# Altium PCB DomeControl.PcbDoc
Units mm, origin at the board's own origin, x right, y up, seen from the top; angles counter-clockwise.
Board outline 65.53 x 80.14 mm, 2 copper layers (Top Layer, Bottom Layer); 28 components, 34 nets, 112 pads, 0 vias.
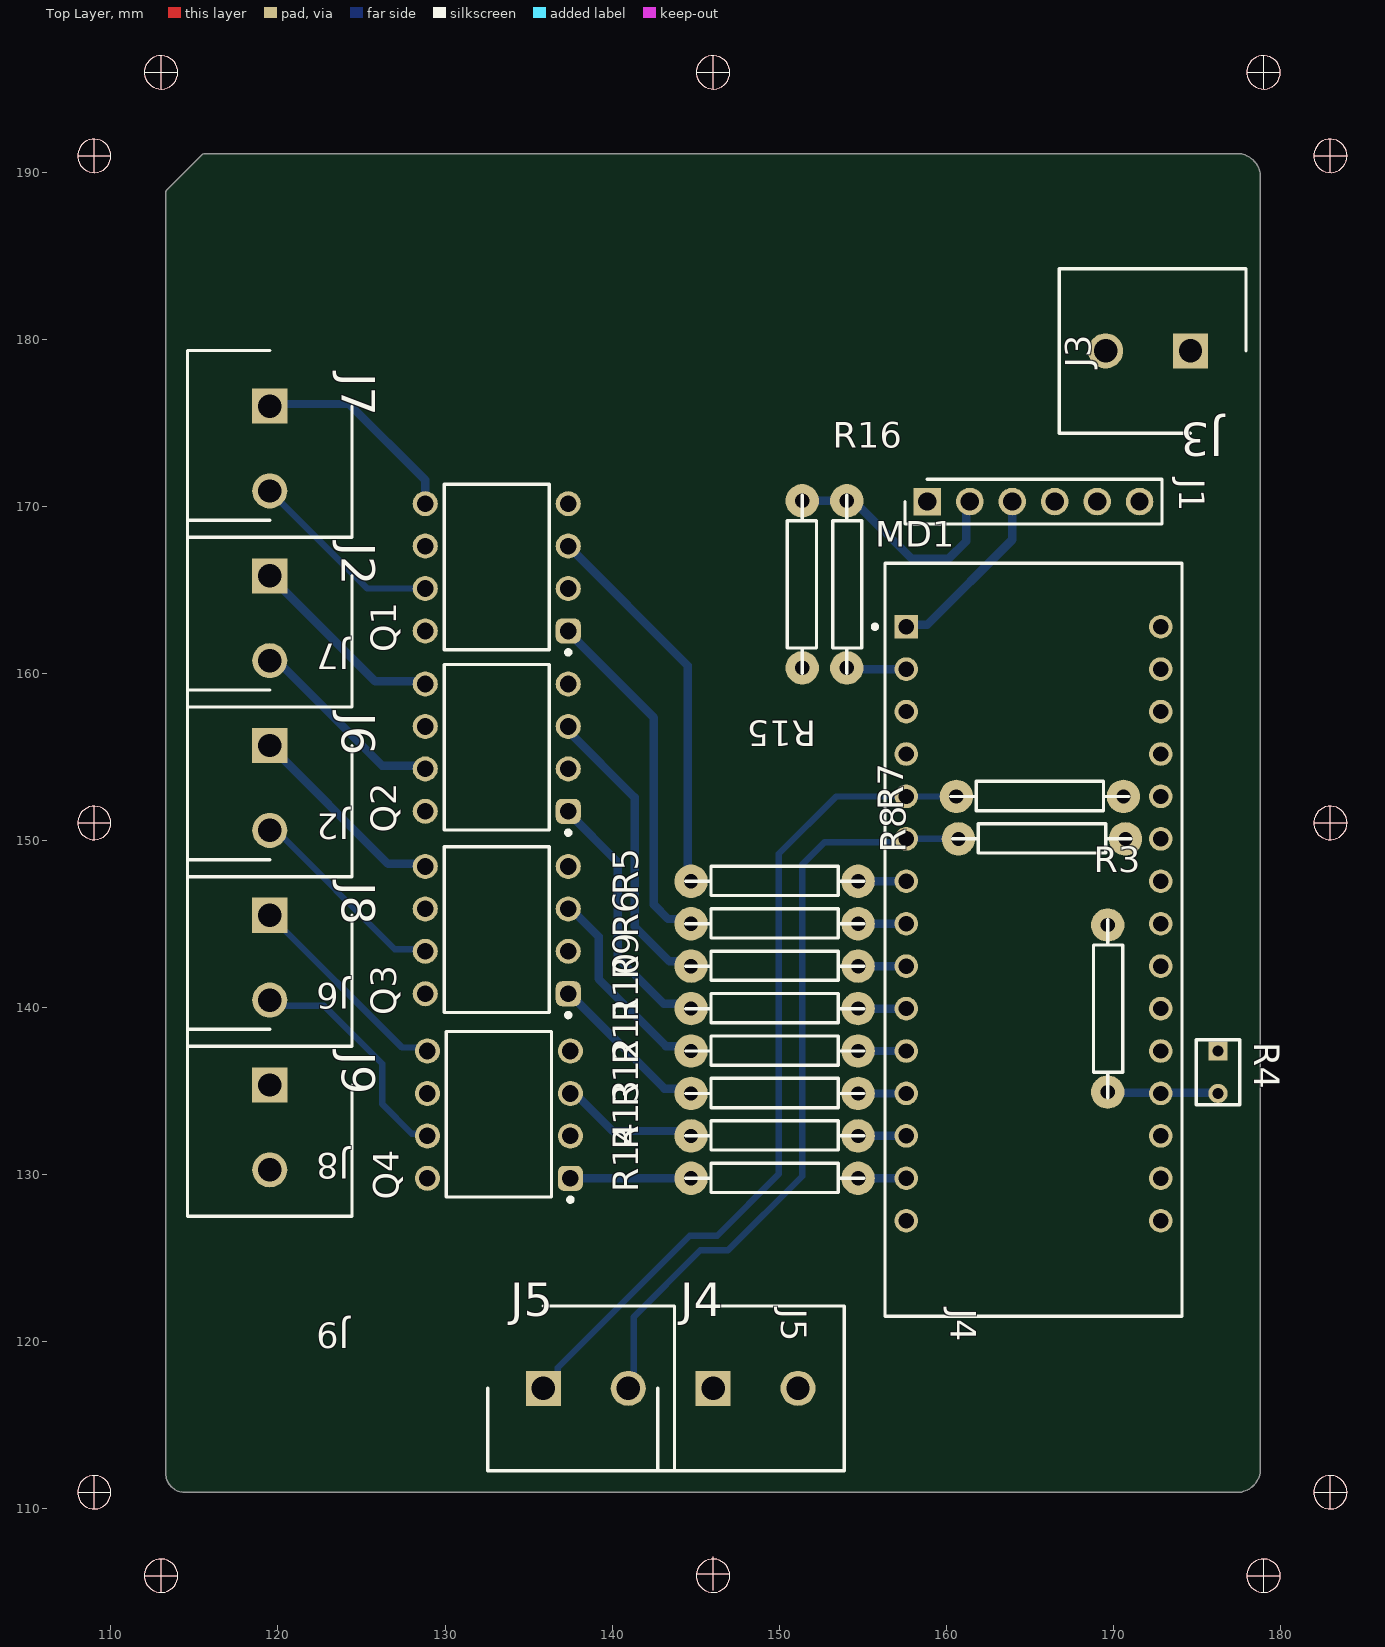
[diagram p0: Top Layer view]
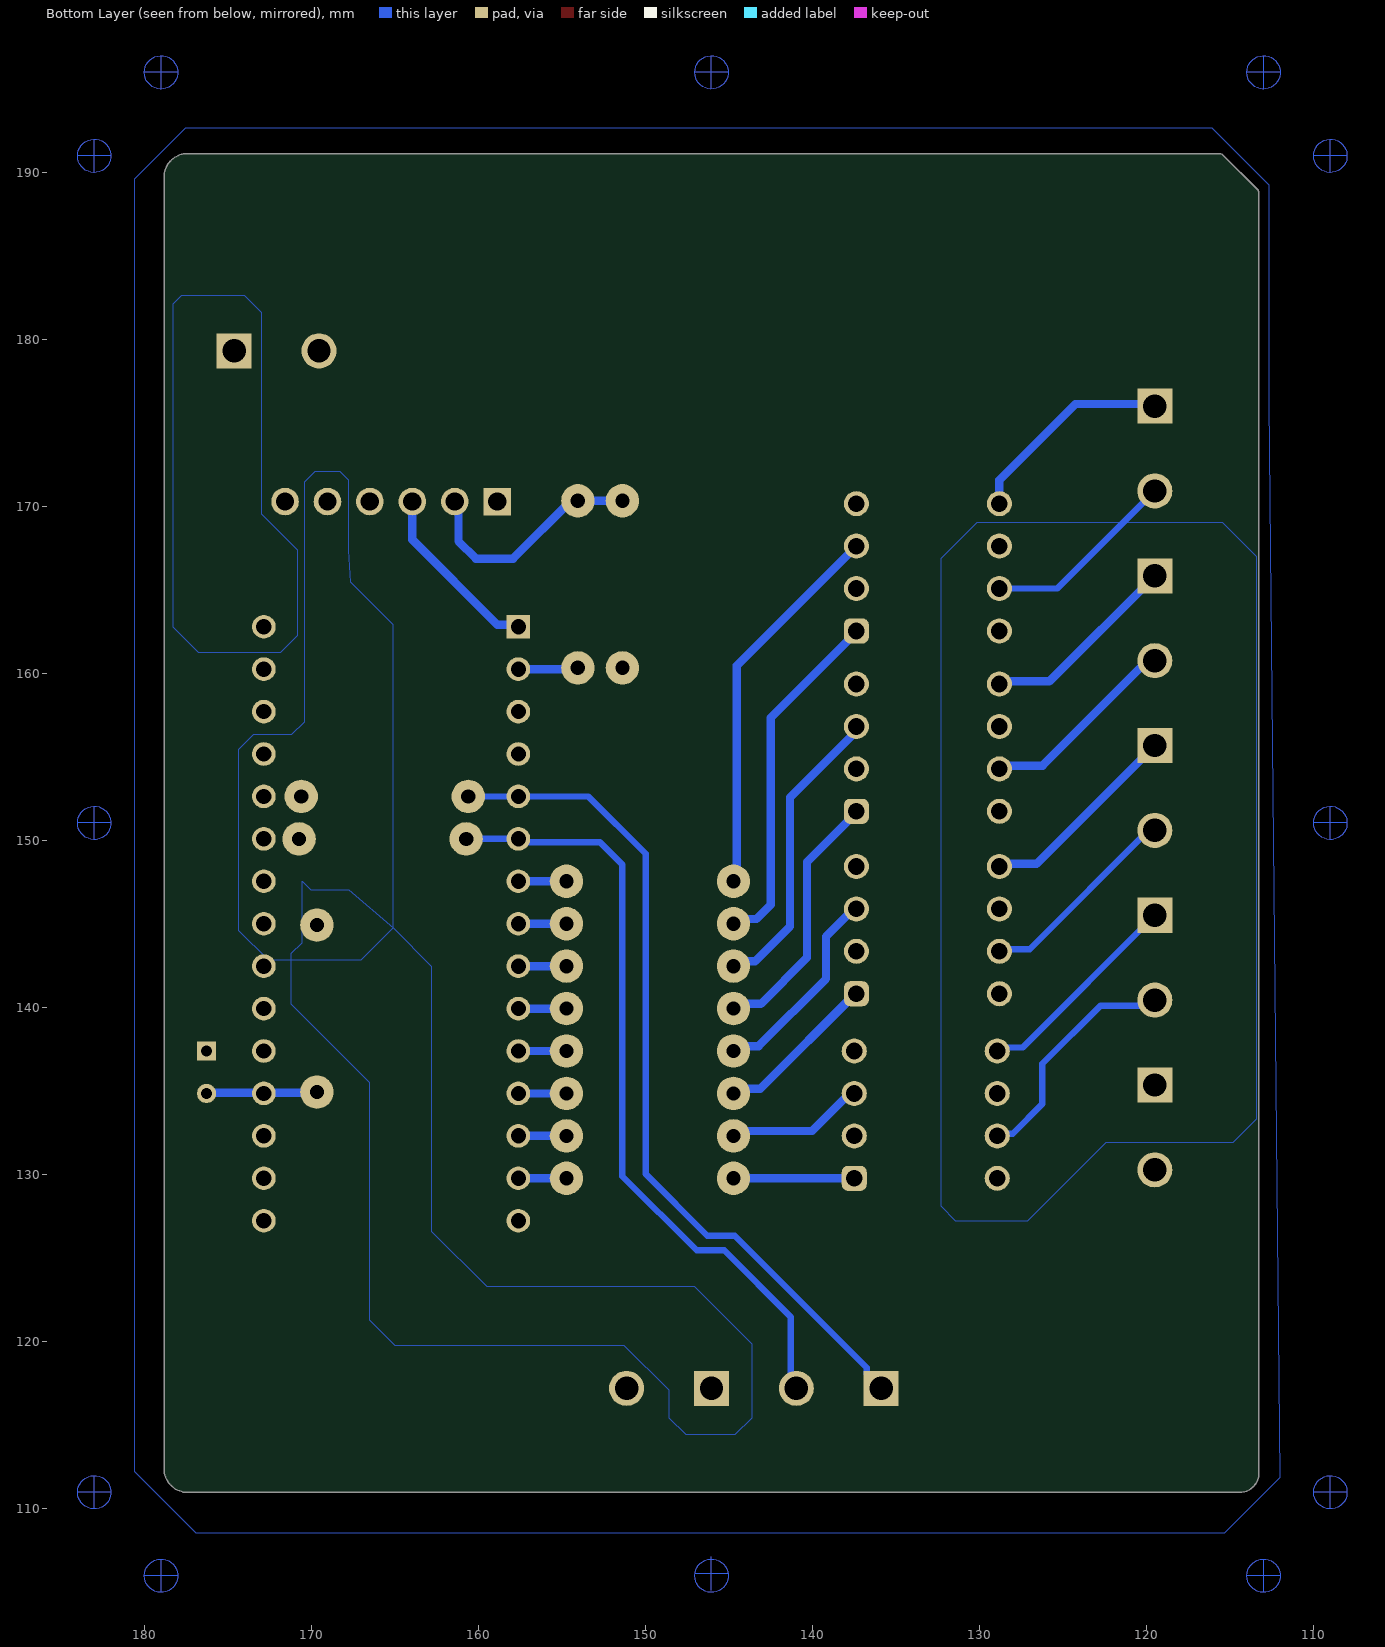
[diagram p1: Bottom Layer view, seen from below]

## Layer stack, top to bottom
Top Solder: solder mask 0.0102, Solder Resist, Dk 3.5
Top Layer: signal copper 0.0356
Dielectric 1: dielectric 0.32, FR-4, Dk 4.8
Bottom Layer: signal copper 0.0356
Bottom Solder: solder mask 0.0102, Solder Resist, Dk 3.5

## Board outline
113.284,112.125 ccw(c114.411,112.125) 114.411,110.998 114.427,110.998 177.689,110.998 177.79,111.048 ccw(c177.419,112.395) 178.816,112.395 178.816,189.738 ccw(c177.419,189.738) 177.77,191.091 177.673,191.135 115.57,191.135 115.48,191.098 113.321,188.939 113.284,188.849

## Design rules (kind name [scope] priority, off if disabled: settings)
AssemblyTestPointUsage [All] p0: scope1count=1 scope1_0_kind=Board scope1_0_value=Board scope2count=1 scope2_0_kind=Board scope2_0_value=Board commentlength=0
AssemblyTestpoint [All] p0: scope1count=1 scope1_0_kind=Board scope1_0_value=Board scope2count=1 scope2_0_kind=Board scope2_0_value=Board commentlength=0
BoardOutlineClearance [All] p0: scope1count=1 scope1_0_kind=Board scope1_0_value=Board scope2count=1 scope2_0_kind=Board scope2_0_value=Board commentlength=0 gap=1
BoardOutlineClearance [All] p1: gap=1 ignorepadtopadclearanceinfootprint=FALSE
Clearance Clearance_1 [All] p0 off: scope1count=1 scope1_0_kind=Board scope1_0_value=Board scope2count=1 scope2_0_kind=Board scope2_0_value=Board commentlength=114 gap=0.5 // Protel DXP Scope 1 Expression Was: InNamedPolygon('GND') or InNamedPolygon('+24V') or InNamedPolygon('+5V_ex')
Clearance [All] p0: scope1count=1 scope1_0_kind=Board scope1_0_value=Board scope2count=1 scope2_0_kind=Board scope2_0_value=Board commentlength=0 gap=0.152
Clearance Clearance_1 [InNamedPolygon('GND') or InNamedPolygon('+24V') or InNamedPolygon('+5V_ex')] p1: gap=0.5 ignorepadtopadclearanceinfootprint=FALSE
Clearance [All] p2: gap=0.152 ignorepadtopadclearanceinfootprint=FALSE
ComponentClearance [All] p0: scope1count=1 scope1_0_kind=Board scope1_0_value=Board scope2count=1 scope2_0_kind=Board scope2_0_value=Board commentlength=0 gap=0.254 collisioncheckmode=3
DiffPairsRouting [All] p0: scope1count=1 scope1_0_kind=Board scope1_0_value=Board scope2count=1 scope2_0_kind=Board scope2_0_value=Board commentlength=0
DiffPairsRouting [All] p1: maxlimit=10 minlimit=0.2 mostfreqgap=0.2 toplayer_minwidth=0.381 toplayer_maxwidth=0.381 toplayer_prefwidth=0.381 bottomlayer_minwidth=0.381 bottomlayer_maxwidth=0.381 bottomlayer_prefwidth=0.381 maxuncoupledlength=12.7
FabricationTestPointUsage FabricationTestPointUsage_1 [All] p0: scope1count=1 scope1_0_kind=Board scope1_0_value=Board scope2count=1 scope2_0_kind=Board scope2_0_value=Board commentlength=0 valid=0 allowmultiple=FALSE
FabricationTestPointUsage FabricationTestPointUsage_1 [All] p1: valid=0 allowmultiple=FALSE
FabricationTestpoint FabricationTestpoint_1 [All] p0: scope1count=1 scope1_0_kind=Board scope1_0_value=Board scope2count=1 scope2_0_kind=Board scope2_0_value=Board commentlength=0 side=3 testpointundercomponent=TRUE minsize=1.016 maxsize=2.54 preferedsize=1.524 minholesize=0 maxholesize=1.016 preferedholesize=0.813 testpointgrid=0.025
FabricationTestpoint FabricationTestpoint_1 [All] p1: side=3 testpointundercomponent=TRUE minsize=1.016 maxsize=2.54 preferedsize=1.524 minholesize=0 maxholesize=1.016 preferedholesize=0.813 testpointgrid=0.025 allowsidetop=TRUE allowsidebottom=TRUE usegrid=TRUE gridtolerance=0
FanoutControl Fanout_Default [All] p0: scope1count=1 scope1_0_kind=Board scope1_0_value=Board scope2count=1 scope2_0_kind=Board scope2_0_value=Board commentlength=30 // Fanout_Default (Default Rule)
FanoutControl Fanout_Small [All] p0 off: scope1count=1 scope1_0_kind=Board scope1_0_value=Board scope2count=1 scope2_0_kind=Board scope2_0_value=Board commentlength=84 // Protel DXP Scope 1 Expression Was: (CompPinCount < 5)   Fanout_Small (Default Rule)
FanoutControl Fanout_SOIC [All] p0 off: scope1count=1 scope1_0_kind=Board scope1_0_value=Board scope2count=1 scope2_0_kind=Board scope2_0_value=Board commentlength=71 // Protel DXP Scope 1 Expression Was: IsSOIC   Fanout_SOIC (Default Rule)
FanoutControl Fanout_LCC [All] p0 off: scope1count=1 scope1_0_kind=Board scope1_0_value=Board scope2count=1 scope2_0_kind=Board scope2_0_value=Board commentlength=69 // Protel DXP Scope 1 Expression Was: IsLCC   Fanout_LCC (Default Rule)
FanoutControl Fanout_BGA [All] p0 off: scope1count=1 scope1_0_kind=Board scope1_0_value=Board scope2count=1 scope2_0_kind=Board scope2_0_value=Board commentlength=69 // Protel DXP Scope 1 Expression Was: IsBGA   Fanout_BGA (Default Rule)
Height [All] p0: scope1count=1 scope1_0_kind=Board scope1_0_value=Board scope2count=1 scope2_0_kind=Board scope2_0_value=Board commentlength=0
HoleSize FabricationTestPointUsage [All] p0 off: scope1count=1 scope1_0_kind=Board scope1_0_value=Board scope2count=1 scope2_0_kind=Board scope2_0_value=Board commentlength=0 absolutevalues=TRUE maxlimit=2.54 minlimit=0.025 maxpercent=80.000 minpercent=20.000
HoleSize FabricationTestpoint [All] p0 off: scope1count=1 scope1_0_kind=Board scope1_0_value=Board scope2count=1 scope2_0_kind=Board scope2_0_value=Board commentlength=0 absolutevalues=TRUE maxlimit=2.54 minlimit=0.025 maxpercent=80.000 minpercent=20.000
HoleSize [All] p0: scope1count=1 scope1_0_kind=Board scope1_0_value=Board scope2count=1 scope2_0_kind=Board scope2_0_value=Board commentlength=0 absolutevalues=TRUE maxlimit=6 minlimit=0.2 maxpercent=80.000 minpercent=20.000
HoleSize [All] p1: absolutevalues=TRUE maxlimit=6 minlimit=0.2 maxpercent=80.000 minpercent=20.000
HoleSize FabricationTestpoint [All] p2 off: absolutevalues=TRUE maxlimit=2.54 minlimit=0.025 maxpercent=80.000 minpercent=20.000
HoleSize FabricationTestPointUsage [All] p3 off: absolutevalues=TRUE maxlimit=2.54 minlimit=0.025 maxpercent=80.000 minpercent=20.000
HoleToHoleClearance [All] p0: scope1count=1 scope1_0_kind=Board scope1_0_value=Board scope2count=1 scope2_0_kind=Board scope2_0_value=Board commentlength=0
LayerPairs [All] p0: scope1count=1 scope1_0_kind=Board scope1_0_value=Board scope2count=1 scope2_0_kind=Board scope2_0_value=Board commentlength=0 enforce=TRUE
MinimumSolderMaskSliver [All] p0: scope1count=1 scope1_0_kind=Board scope1_0_value=Board scope2count=1 scope2_0_kind=Board scope2_0_value=Board commentlength=0
NetAntennae [All] p0: scope1count=1 scope1_0_kind=Board scope1_0_value=Board scope2count=1 scope2_0_kind=Board scope2_0_value=Board commentlength=0
PasteMaskExpansion [All] p0: scope1count=1 scope1_0_kind=Board scope1_0_value=Board scope2count=1 scope2_0_kind=Board scope2_0_value=Board commentlength=0 expansion=0
PlaneClearance [All] p0: scope1count=1 scope1_0_kind=Board scope1_0_value=Board scope2count=1 scope2_0_kind=Board scope2_0_value=Board commentlength=0 clearance=0.1
PlaneClearance [All] p1: clearance=0.1
PlaneConnect PP_Other [All] p0: scope1count=1 scope1_0_kind=Board scope1_0_value=Board scope2count=1 scope2_0_kind=Board scope2_0_value=Board commentlength=0 planeconnectstyle=Relief reliefexpansion=0.4 reliefentries=4 reliefconductorwidth=0.5 reliefairgap=0.15
PlaneConnect PP_Signal [All] p0: scope1count=1 scope1_0_kind=Board scope1_0_value=Board scope2count=1 scope2_0_kind=Board scope2_0_value=Board commentlength=0 planeconnectstyle=Relief reliefexpansion=0.4 reliefentries=4 reliefconductorwidth=0.5 reliefairgap=0.15
PlaneConnect PP_V_Plane [All] p0: scope1count=1 scope1_0_kind=Net scope1_0_value=+ scope2count=1 scope2_0_kind=Board scope2_0_value=Board commentlength=0 planeconnectstyle=Relief reliefexpansion=0.4 reliefentries=4 reliefconductorwidth=0.5 reliefairgap=0.15
PlaneConnect PP_GND [All] p0: scope1count=1 scope1_0_kind=Net scope1_0_value=GND scope2count=1 scope2_0_kind=Board scope2_0_value=Board commentlength=0 planeconnectstyle=Relief reliefexpansion=0.4 reliefentries=4 reliefconductorwidth=0.5 reliefairgap=0.15
PlaneConnect PP_GND [InNet('GND')] p1: planeconnectstyle=Relief reliefexpansion=0.4 reliefentries=4 reliefconductorwidth=0.5 reliefairgap=0.15
PlaneConnect PP_V_Plane [InNet('+')] p2: planeconnectstyle=Relief reliefexpansion=0.4 reliefentries=4 reliefconductorwidth=0.5 reliefairgap=0.15
PlaneConnect PP_Signal [All] p3: planeconnectstyle=Relief reliefexpansion=0.4 reliefentries=4 reliefconductorwidth=0.5 reliefairgap=0.15
PlaneConnect PP_Other [All] p4: planeconnectstyle=Relief reliefexpansion=0.4 reliefentries=4 reliefconductorwidth=0.5 reliefairgap=0.15
PolygonConnect PC_Other [All] p0: scope1count=1 scope1_0_kind=Board scope1_0_value=Board scope2count=1 scope2_0_kind=Board scope2_0_value=Board commentlength=0 connectstyle=Relief reliefconductorwidth=0.5 reliefentries=4 polygonreliefangle="90 Angle"
PolygonConnect PC_Signal [All] p0: scope1count=1 scope1_0_kind=Board scope1_0_value=Board scope2count=1 scope2_0_kind=Board scope2_0_value=Board commentlength=0 connectstyle=Relief reliefconductorwidth=0.5 reliefentries=4 polygonreliefangle="90 Angle"
PolygonConnect PC_V_Plane [All] p0: scope1count=1 scope1_0_kind=Net scope1_0_value=+* scope2count=1 scope2_0_kind=Board scope2_0_value=Board commentlength=0 connectstyle=Relief reliefconductorwidth=0.5 reliefentries=4 polygonreliefangle="90 Angle"
PolygonConnect PC_GND [All] p0: scope1count=1 scope1_0_kind=Net scope1_0_value=GND scope2count=1 scope2_0_kind=Board scope2_0_value=Board commentlength=0 connectstyle=Relief reliefconductorwidth=0.5 reliefentries=4 polygonreliefangle="90 Angle"
PolygonConnect PC_GND [InNet('GND')] p1: connectstyle=Relief reliefconductorwidth=0.5 reliefentries=4 polygonreliefangle="90 Angle" airgapwidth=0.203
PolygonConnect PC_V_Plane [InNet('+*')] p2: connectstyle=Relief reliefconductorwidth=0.5 reliefentries=4 polygonreliefangle="90 Angle" airgapwidth=0.203
PolygonConnect PC_Signal [All] p3: connectstyle=Relief reliefconductorwidth=0.5 reliefentries=4 polygonreliefangle="90 Angle" airgapwidth=0.203
PolygonConnect PC_Other [All] p4: connectstyle=Relief reliefconductorwidth=0.5 reliefentries=4 polygonreliefangle="90 Angle" airgapwidth=0.203
RoomDefinition Connectors [All] p0: scope1count=1 scope1_0_kind=ComponentClass scope1_0_value=Connectors scope2count=1 scope2_0_kind=Board scope2_0_value=Board commentlength=0 region_x1=0 region_y1=0 region_x2=20000000 region_y2=10000000 confinementstyle=ConfineIn
RoomDefinition Connectors [InComponentClass('Connectors')] p1: confinementstyle=ConfineIn formatcopy=TRUE lockcomponents=FALSE outline 0,0 50.8,0 50.8,25.4 0,25.4
RoutingCorners [All] p0: scope1count=1 scope1_0_kind=Board scope1_0_value=Board scope2count=1 scope2_0_kind=Board scope2_0_value=Board commentlength=0 cornerstyle=45-Degree minsetback=1.25 maxsetback=1.25
RoutingCorners [All] p1: cornerstyle=45-Degree minsetback=1.25 maxsetback=1.25
RoutingLayers [All] p0: scope1count=1 scope1_0_kind=Board scope1_0_value=Board scope2count=1 scope2_0_kind=Board scope2_0_value=Board commentlength=0 top layer=Automatic bottom layer=Automatic
RoutingPriority [All] p0: scope1count=1 scope1_0_kind=Board scope1_0_value=Board scope2count=1 scope2_0_kind=Board scope2_0_value=Board commentlength=0
RoutingTopology [All] p0: scope1count=1 scope1_0_kind=Board scope1_0_value=Board scope2count=1 scope2_0_kind=Board scope2_0_value=Board commentlength=0 topology=Shortest
RoutingVias [All] p0: scope1count=1 scope1_0_kind=Board scope1_0_value=Board scope2count=1 scope2_0_kind=Board scope2_0_value=Board commentlength=0 holewidth=0.3 width=0.6 viastyle="Through Hole" minholewidth=0.2 minwidth=0.45 maxholewidth=0.45 maxwidth=0.75
RoutingVias [All] p1: holewidth=0.3 width=0.6 viastyle="Through Hole" minholewidth=0.2 minwidth=0.45 maxholewidth=0.45 maxwidth=0.75
ShortCircuit [All] p0: scope1count=1 scope1_0_kind=Board scope1_0_value=Board scope2count=1 scope2_0_kind=Board scope2_0_value=Board commentlength=0 allowed=FALSE
SilkToBoardRegionClearance [All] p0: scope1count=1 scope1_0_kind=Board scope1_0_value=Board scope2count=1 scope2_0_kind=Board scope2_0_value=Board commentlength=0
SilkToSilkClearance [All] p0: scope1count=1 scope1_0_kind=Board scope1_0_value=Board scope2count=1 scope2_0_kind=Board scope2_0_value=Board commentlength=0
SilkToSolderMaskClearance [All] p0 off: scope1count=1 scope1_0_kind=Board scope1_0_value=Board scope2count=1 scope2_0_kind=Board scope2_0_value=Board commentlength=44 // Protel DXP Scope 1 Expression Was: IsPad
SolderMaskExpansion [All] p0: scope1count=1 scope1_0_kind=Board scope1_0_value=Board scope2count=1 scope2_0_kind=Board scope2_0_value=Board commentlength=0 expansion=0.075
SolderMaskExpansion [All] p1: expansion=0.075 istentingtop=FALSE
SupplyNets "Schematic Supply Nets_1" [All] p0: scope1count=1 scope1_0_kind=Net scope1_0_value=Vin scope2count=1 scope2_0_kind=Board scope2_0_value=Board commentlength=0 voltage=0.000
SupplyNets "Schematic Supply Nets_5" [All] p0: scope1count=1 scope1_0_kind=Net scope1_0_value=+5V scope2count=1 scope2_0_kind=Board scope2_0_value=Board commentlength=0 voltage=0.000
SupplyNets "Schematic Supply Nets_4" [All] p0: scope1count=1 scope1_0_kind=Net scope1_0_value=+24V scope2count=1 scope2_0_kind=Board scope2_0_value=Board commentlength=0 voltage=0.000
SupplyNets "Schematic Supply Nets" [All] p0: scope1count=1 scope1_0_kind=Net scope1_0_value=GND scope2count=1 scope2_0_kind=Board scope2_0_value=Board commentlength=0 voltage=0.000
SupplyNets "Schematic Supply Nets_1" [InNet('Vin')] p1: voltage=0.000
SupplyNets "Schematic Supply Nets_5" [InNet('+5V')] p2: voltage=0.000
SupplyNets "Schematic Supply Nets_4" [InNet('+24V')] p3: voltage=0.000
SupplyNets "Schematic Supply Nets" [InNet('GND')] p4: voltage=0.000
UnRoutedNet [All] p0: scope1count=1 scope1_0_kind=Board scope1_0_value=Board scope2count=1 scope2_0_kind=Board scope2_0_value=Board commentlength=0
UnpouredPolygon [All] p0: scope1count=1 scope1_0_kind=Board scope1_0_value=Board scope2count=1 scope2_0_kind=Board scope2_0_value=Board commentlength=0
Width [All] p0: scope1count=1 scope1_0_kind=Board scope1_0_value=Board scope2count=1 scope2_0_kind=Board scope2_0_value=Board commentlength=0 maxlimit=10 minlimit=0.125 preferedwidth=0.15
Width [All] p1: maxlimit=10 minlimit=0.125 preferedwidth=0.15
23 further rules are at their usual default settings.

## Classes and differential pairs
net class D[4..11]: D4 D5 D6 D7 D8 D9 D10 D11

## Components (designator, comment, footprint, x,y, rotation, side; value= is the part's Value field where it differs from the comment)
J1 "61300611121" "6P Stiftleiste 2,54" 158.877,170.307 r0 top
J2 "PM_5.08_3_90_3.5_SW_-176052000" "MKDSN 5,08/2 2,5" 119.507,165.862 r270 top
J3 "PM_5.08_3_90_3.5_SW_-176052000" "MKDSN 5,08/2 2,5" 174.625,179.324 r180 top
J4 "PM_5.08_3_90_3.5_SW_-176052000" "MKDSN 5,08/2 2,5" 146.05,117.221 r0 top
J5 "PM_5.08_3_90_3.5_SW_-176052000" "MKDSN 5,08/2 2,5" 135.89,117.221 r0 top
J6 "PM_5.08_3_90_3.5_SW_-176052000" "MKDSN 5,08/2 2,5" 119.507,155.702 r270 top
J7 "PM_5.08_3_90_3.5_SW_-176052000" "MKDSN 5,08/2 2,5" 119.507,176.022 r270 top
J8 "PM_5.08_3_90_3.5_SW_-176052000" "MKDSN 5,08/2 2,5" 119.507,145.542 r270 top
J9 "PM_5.08_3_90_3.5_SW_-176052000" "MKDSN 5,08/2 2,5" 119.507,135.382 r270 top
MD1 "A000005" FP-A000005-MFG 165.227,144.082 r0 top
Q1 "140827180010" WL-OCPT_DIP8_Standard 133.096,166.37 r90 top
Q2 "140827180010" WL-OCPT_DIP8_Standard 133.096,155.575 r90 top
Q3 "140827180010" WL-OCPT_DIP8_Standard 133.096,144.653 r90 top
Q4 "140827180010" WL-OCPT_DIP8_Standard 133.223,133.604 r90 top
R3 "10k" "laser AXIAL-0.5" 169.672,139.954 r90 top
R4 "10k" FP-103AT-2-MFG 176.276,136.144 r270 top
R5 "330R" "laser AXIAL-0.5" 149.733,147.574 r180 top
R6 "330R" "laser AXIAL-0.5" 149.733,145.034 r180 top
R7 "10k" "laser AXIAL-0.5" 165.608,152.654 r180 top
R8 "10k" "laser AXIAL-0.5" 165.735,150.114 r180 top
R9 "330R" "laser AXIAL-0.5" 149.733,142.494 r180 top
R10 "330R" "laser AXIAL-0.5" 149.733,139.954 r180 top
R11 "330R" "laser AXIAL-0.5" 149.733,137.414 r180 top
R12 "330R" "laser AXIAL-0.5" 149.733,134.874 r180 top
R13 "330R" "laser AXIAL-0.5" 149.733,132.334 r180 top
R14 "330R" "laser AXIAL-0.5" 149.733,129.794 r180 top
R15 "2k" "laser AXIAL-0.5" 151.384,165.354 r270 top
R16 "1k" "laser AXIAL-0.5" 154.051,165.354 r90 top

## Footprints (in the part's own frame and the unit in brackets; to place one, negate y for a bottom-side part, rotate by r counter-clockwise, add the part's x,y. Pads: shape width x height; smd on the part's side, far side on the other; paste and mask are expansions set on the pad)
"6P Stiftleiste 2,54" [mm] "6 Pin Stiftleiste mit 2,54 Raster"
  rect 1.65x1.65 / inner round 1.65 / far side rect 1.65x1.65 hole 1.1: 1(0,0)
  round 1.65 hole 1.1: 2(2.54,0) 3(5.08,0) 4(7.62,0) 5(10.16,0) 6(12.7,0)
  silkscreen extent -1.35,-1.35 14.05,1.35
FP-103AT-2-MFG [mm]
  rect 1.15x1.15 hole 0.65 paste+0 mask+0: 1(-1.27,0)
  round 1.15 hole 0.65 paste+0 mask+0: 2(1.27,0)
  silkscreen extent -1.95,-1.3 1.95,1.3
FP-A000005-MFG [mil]
  rect 55.67x55.67 hole 35.98 paste+0 mask+0: 1(-300,737.5)
  round 55.67 hole 35.98 paste+0 mask+0: 2(-300,637.5) 3(-300,537.5) 4(-300,437.5) 5(-300,337.5) 6(-300,237.5) 7(-300,137.5) 8(-300,37.5) 9(-300,-62.5) 10(-300,-162.5) 11(-300,-262.5) 12(-300,-362.5) 13(-300,-462.5) 14(-300,-562.5) 15(-300,-662.5) 16(300,-662.5) 17(300,-562.5) 18(300,-462.5) 19(300,-362.5) 20(300,-262.5) 21(300,-162.5) 22(300,-62.5) 23(300,37.5) 24(300,137.5) 25(300,237.5) 26(300,337.5) 27(300,437.5) 28(300,537.5) 29(300,637.5) 30(300,737.5)
  silkscreen extent -379,-888 350,888
"laser AXIAL-0.5" [mm] "Axial Device, Thru-Hole; 2 Leads; 0.5 in Pin Spacing"
  round 2 hole 0.85: 1(-5,0) 2(5,0)
  silkscreen extent -5.33,-0.9 5.33,0.85
"MKDSN 5,08/2 2,5" [mm]
  rect 2.1x2.1 / inner round 2.1 / far side rect 2.1x2.1 hole 1.4: 1(0,0)
  round 2.1 hole 1.4: 2(5.08,0)
  silkscreen extent -3.32,-4.92 7.85,4.92
WL-OCPT_DIP8_Standard [mm] "Phototransistor, THT, DIP8, body 9.76x9.50mm"
  rrect50% 1.5x1.5 hole 1 paste+0: 1(-3.81,-4.28)
  round 1.5 hole 1 paste+0: 2(-1.27,-4.28) 3(1.27,-4.28) 4(3.81,-4.28) 5(3.81,4.28) 6(1.27,4.28) 7(-1.27,4.28) 8(-3.81,4.28)
  silkscreen extent -5.21,-4.41 4.98,3.15

## Part data
J1: library part "6P Stiftleiste 2,54", "6 Pin Stiftleiste Raster 2,54 mm / Wurth Elektronik WR-PHD Series, Series Number 6130, 2.54mm Pitch 6 Way 1 Row Straight PCB Header, Solder Termination / RS Nr.: 61300711121"
J2 J3 J4 J5 J6 J7 J8 J9: library part "MKDSN 5,08/2 2,5", "??5.08mm 2pin 10A 300V ??? ??? ?? ??24-14AWG(0.2-2.5)mm²"
MD1: library part CMP-189986-000002-1, "ARDUINO NANO ATMEGA328 EVAL BRD"
Q1 Q2 Q3 Q4: library part CMP-03913-133672522-1, "140827180010 WL-OCPT - Optocoupler Phototransistor"
R3 R5 R6 R7 R8 R9 R10 R11 R12 R13 R14 R15 R16: library part R-THT
R4: library part "R_Thermistor 2.54", "Thermistor NTC 10KOhm 1% 2-Pin / 103AT-2"

## Nets (pads, with @x,y where several pads share a name; then routed paths per layer and width w, separated by ;. In a path a pad name is that pad's centre, name@x,y a point inside that pad or via, vN(x,y) a via of type N, cw(c..) or ccw(c..) an arc to the next point about the centre after c; other vN are vias at no path point)
+5V: J1.5 J4.1 MD1.27 R3.2 R7.1 R8.1
+24V: J9.1 Q1.6 Q1.8 Q2.6 Q2.8 Q3.6 Q3.8 Q4.6 Q4.8
D4: MD1.7 R5.1 | length 2.9
  Bottom Layer w0.5: R5.1 MD1.7
D5: MD1.8 R6.1 | length 2.9
  Bottom Layer w0.5: R6.1 MD1.8
D6: MD1.9 R9.1 | length 2.9
  Bottom Layer w0.5: R9.1 MD1.9
D7: MD1.10 R10.1 | length 2.9
  Bottom Layer w0.5: R10.1 MD1.10
D8: MD1.11 R11.1 | length 2.9
  Bottom Layer w0.5: R11.1 MD1.11
D9: MD1.12 R12.1 | length 2.9
  Bottom Layer w0.5: R12.1 MD1.12
D10: MD1.13 R13.1 | length 2.9
  Bottom Layer w0.5: R13.1 MD1.13
D11: MD1.14 R14.1 | length 2.9
  Bottom Layer w0.5: R14.1 MD1.14
GND: J1.4 J3.2 J4.2 J9.2 MD1.4 MD1.29 Q1.2 Q1.4 Q2.2 Q2.4 Q3.2 Q3.4 Q4.2 Q4.4 R4.1 R15.2
NetJ1_2: J1.2 R15.1 R16.2 | length 14.2
  Bottom Layer w0.5: R15.1 154.457,170.354 157.925,166.886 160.155,166.886 161.197,167.928 161.197,170.087 J1.2
NetJ1_3: J1.3 MD1.1 | length 10.8
  Bottom Layer w0.5: MD1.1 157.734,162.941 158.877,162.941 163.957,168.021 J1.3
NetJ2_1: J2.1 Q2.5 | length 12
  Bottom Layer w0.5: J2.1 125.819,159.55 128.651,159.55 Q2.5
NetJ2_2: J2.2 Q2.7 | length 12
  Bottom Layer w0.5: J2.2 119.94,160.782 126.226,154.496 128.625,154.496 Q2.7
NetJ5_1: J5.1 MD1.5 R7.2 | length 50.9
  Bottom Layer w0.381: J5.1 136.75,118.081 136.75,118.462 144.653,126.365 146.304,126.365 149.987,130.048 149.987,149.225 153.416,152.654 MD1.5 R7.2
NetJ5_2: J5.2 MD1.6 R8.2 | length 46.6
  Bottom Layer w0.381: J5.2 141.299,117.55 141.299,121.487 145.288,125.476 146.939,125.476 151.384,129.921 151.384,148.581 152.719,149.916 157.409,149.916 MD1.6 R8.2
NetJ6_1: J6.1 Q3.5 | length 12.3
  Bottom Layer w0.5: J6.1 126.592,148.617 128.662,148.617 Q3.5
NetJ6_2: J6.2 Q3.7 | length 12.3
  Bottom Layer w0.381: J6.2 119.888,150.622 127,143.51 128.689,143.51 Q3.7
NetJ7_1: J7.1 Q1.5 | length 12.7
  Bottom Layer w0.5: J7.1 119.634,176.149 124.262,176.149 128.816,171.595 Q1.5
NetJ7_2: J7.2 Q1.7 | length 11.7
  Bottom Layer w0.381: J7.2 125.349,165.1 Q1.7
NetJ8_1: J8.1 Q4.5 | length 12.8
  Bottom Layer w0.381: J8.1 127.421,137.628 128.729,137.628 Q4.5
NetJ8_2: J8.2 Q4.7 | length 14.2
  Bottom Layer w0.381: J8.2 119.836,140.133 122.757,140.133 126.238,136.652 126.238,134.239 128.016,132.461 128.816,132.461 Q4.7
NetMD1_2: MD1.2 R16.1 | length 3.6
  Bottom Layer w0.5: R16.1 154.131,160.274 MD1.2
NetMD1_19: MD1.19 R3.1 R4.2 | length 6.6
  Bottom Layer w0.5: R3.1 169.712,134.914 172.847,134.914 176.236,134.914 R4.2
NetQ1_1: Q1.1 R6.2 | length 21.2
  Bottom Layer w0.5: Q1.1 137.376,162.492 142.494,157.374 142.494,146.177 143.35,145.321 144.446,145.321 R6.2
NetQ1_3: Q1.3 R5.2 | length 23.1
  Bottom Layer w0.5: Q1.3 144.526,160.49 144.526,147.781 R5.2
NetQ2_1: Q2.1 R10.2 | length 15.6
  Bottom Layer w0.5: Q2.1 137.376,151.697 140.335,148.738 140.335,143.002 143.096,140.241 144.446,140.241 R10.2
NetQ2_3: Q2.3 R9.2 | length 18
  Bottom Layer w0.5: Q2.3 137.376,156.574 141.351,152.599 141.351,144.871 143.441,142.781 144.446,142.781 R9.2
NetQ3_1: Q3.1 R12.2 | length 9.8
  Bottom Layer w0.5: Q3.1 137.444,140.843 143.126,135.161 144.446,135.161 R12.2
NetQ3_3: Q3.3 R11.2 | length 12.4
  Bottom Layer w0.5: Q3.3 137.541,145.923 139.192,144.272 139.192,141.732 143.223,137.701 144.446,137.701 R11.2
NetQ4_1: Q4.1 R14.2 | length 7.2
  Bottom Layer w0.5: Q4.1 R14.2
NetQ4_3: Q4.3 R13.2 | length 8.3
  Bottom Layer w0.5: Q4.3 137.774,134.874 140.027,132.621 144.446,132.621 R13.2
Vin: J3.1 MD1.30
pads on no net: J1.1 J1.6 MD1.3 MD1.15 MD1.16 MD1.17 MD1.18 MD1.20 MD1.21 MD1.22 MD1.23 MD1.24 MD1.25 MD1.26 MD1.28
copper on no net: | length 246.8
  Top Layer w0.01: 108,111 110,111 ; 108,151.066 110,151.066 ; 108,191 110,191 ; 109,110 109,112 ; 109,150.066 109,152.067 ; 109,190 109,192 ; 112,106 114,106 ; 112,196 114,196 ; 113,105 113,107 ; 113,195 113,197 ; 145.05,106.125 147.05,106.125 ; 145.05,196.008 147.05,196.008 ; 146.05,105.125 146.05,107.125 ; 146.05,195.008 146.05,197.008 ; 178,106 180,106 ; 178,196 180,196 ; 179,105 179,107 ; 179,195 179,197 ; 182,111 184,111 ; 182,151.066 184,151.066 ; 182,191 184,191 ; 183,110 183,112 ; 183,150.066 183,152.067 ; 183,190 183,192 ; 110,111 ccw(c109,111) 110,111 ; 110,151.066 ccw(c109,151.066) 110,151.066 ; 110,191 ccw(c109,191) 110,191 ; 114,106 ccw(c113,106) 114,106 ; 114,196 ccw(c113,196) 114,196 ; 180,106 ccw(c179,106) 180,106 ; 180,196 ccw(c179,196) 180,196 ; 184,111 ccw(c183,111) 184,111 ; 184,151.066 ccw(c183,151.066) 184,151.066 ; 184,191 ccw(c183,191) 184,191 ; 147.05,106 ccw(c146.05,106) 147.05,106 ; 147.05,196 ccw(c146.05,196) 147.05,196
  Bottom Layer w0.01: 108,111 110,111 ; 108,151.066 110,151.066 ; 108,191 110,191 ; 109,110 109,112 ; 109,150.066 109,152.067 ; 109,190 109,192 ; 112,106 114,106 ; 112,196 114,196 ; 113,105 113,107 ; 113,195 113,197 ; 145.05,106.125 147.05,106.125 ; 145.05,196.008 147.05,196.008 ; 146.05,105.125 146.05,107.125 ; 146.05,195.008 146.05,197.008 ; 178,106 180,106 ; 178,196 180,196 ; 179,105 179,107 ; 179,195 179,197 ; 182,111 184,111 ; 182,151.066 184,151.066 ; 182,191 184,191 ; 183,110 183,112 ; 183,150.066 183,152.067 ; 183,190 183,192 ; 110,111 ccw(c109,111) 110,111 ; 110,151.066 ccw(c109,151.066) 110,151.066 ; 110,191 ccw(c109,191) 110,191 ; 114,106 ccw(c113,106) 114,106 ; 114,196 ccw(c113,196) 114,196 ; 180,106 ccw(c179,106) 180,106 ; 180,196 ccw(c179,196) 180,196 ; 184,111 ccw(c183,111) 184,111 ; 184,151.066 ccw(c183,151.066) 184,151.066 ; 184,191 ccw(c183,191) 184,191 ; 147.05,106 ccw(c146.05,106) 147.05,106 ; 147.05,196 ccw(c146.05,196) 147.05,196

## Polygon pours and split planes (outlines as drawn)
GND on Bottom Layer "GND" (solid, remove dead copper, pour order 5): 112.649,176.276 112.649,189.23 116.078,192.659 177.546,192.659 180.594,189.611 180.594,112.268 176.911,108.585 115.316,108.585 112.014,111.887
+24V on Bottom Layer "+24V" (solid, remove dead copper, pour order 4): 113.411,167.005 115.443,169.037 130.175,169.037 132.336,166.876 132.336,128.145 131.445,127.254 127.127,127.254 122.428,131.953 114.808,131.953 113.411,133.35
+5V on Bottom Layer "+5V_A" (solid, remove dead copper, pour order 3): 165.1,144.78 162.814,142.494 162.814,126.619 159.512,123.317 147.066,123.317 143.637,119.888 143.637,115.443 144.653,114.427 147.574,114.427 148.59,115.443 148.59,117.094 151.257,119.761 164.973,119.761 166.497,121.285 166.497,135.509 171.196,140.208 171.196,143.256 170.561,143.891 170.561,147.574 170.053,147.066 167.767,147.066
+5V on Bottom Layer "+5V" (solid, remove dead copper, pour order 2): 167.767,167.386 167.767,171.577 168.275,172.085 169.799,172.085 170.434,171.45 170.434,157.099 171.196,156.337 173.482,156.337 174.371,155.448 174.371,144.653 172.593,142.875 167.005,142.875 165.1,144.78 165.1,162.941 167.64,165.481
Vin on Bottom Layer "+Vin" (solid, remove dead copper, pour order 1): 172.974,169.561 172.974,181.61 173.99,182.626 177.8,182.626 178.308,182.118 178.308,162.814 176.784,161.29 171.831,161.29 170.815,162.306 170.815,167.402

## Silkscreen, mask and mechanical layers (free items; w line width, h text height)
Top Overlay:
  circle w0.01: c183,191 r1
  circle w0.01: c183,151.066 r1
  circle w0.01: c183,111 r1
  circle w0.01: c146.05,106 r1
  circle w0.01: c113,106 r1
  circle w0.01: c179,106 r1
  circle w0.01: c109,151.066 r1
  circle w0.01: c109,191 r1
  circle w0.01: c109,111 r1
  circle w0.01: c179,196 r1
  circle w0.01: c113,196 r1
  circle w0.01: c146.05,196 r1
  lines w0.01: 108,111 110,111 ; 108,151.066 110,151.066 ; 108,191 110,191 ; 109,110 109,112 ; 109,150.066 109,152.067 ; 109,190 109,192 ; 112,106 114,106 ; 112,196 114,196 ; 113,105 113,107 ; 113,195 113,197 ; 145.05,106.125 147.05,106.125 ; 145.05,196.008 147.05,196.008 ; 146.05,105.125 146.05,107.125 ; 146.05,195.008 146.05,197.008 ; 178,106 180,106 ; 178,196 180,196 ; 179,105 179,107 ; 179,195 179,197 ; 182,111 184,111 ; 182,151.066 184,151.066 ; 182,191 184,191 ; 183,110 183,112 ; 183,150.066 183,152.067 ; 183,190 183,192
Bottom Solder:
  circle w0.01: c183,191 r1
  circle w0.01: c183,151.066 r1
  circle w0.01: c183,111 r1
  circle w0.01: c146.05,106 r1
  circle w0.01: c179,106 r1
  circle w0.01: c109,191 r1
  circle w0.01: c109,151.066 r1
  circle w0.01: c109,111 r1
  circle w0.01: c113,106 r1
  circle w0.01: c179,196 r1
  circle w0.01: c113,196 r1
  circle w0.01: c146.05,196 r1
  lines w0.01: 108,111 110,111 ; 108,151.066 110,151.066 ; 108,191 110,191 ; 109,110 109,112 ; 109,150.066 109,152.067 ; 109,190 109,192 ; 112,106 114,106 ; 112,196 114,196 ; 113,105 113,107 ; 113,195 113,197 ; 145.05,106.125 147.05,106.125 ; 145.05,196.008 147.05,196.008 ; 146.05,105.125 146.05,107.125 ; 146.05,195.008 146.05,197.008 ; 178,106 180,106 ; 178,196 180,196 ; 179,105 179,107 ; 179,195 179,197 ; 182,111 184,111 ; 182,151.066 184,151.066 ; 182,191 184,191 ; 183,110 183,112 ; 183,150.066 183,152.067 ; 183,190 183,192
Drill Guide:
  circle w0.01: c109,111 r1
  circle w0.01: c113,106 r1
  circle w0.01: c113,196 r1
  circle w0.01: c109,191 r1
  circle w0.01: c109,151.066 r1
  circle w0.01: c179,106 r1
  circle w0.01: c146.05,106 r1
  circle w0.01: c183,111 r1
  circle w0.01: c183,191 r1
  circle w0.01: c183,151.066 r1
  circle w0.01: c146.05,196 r1
  circle w0.01: c179,196 r1
  lines w0.01: 108,111 110,111 ; 108,151.066 110,151.066 ; 108,191 110,191 ; 109,110 109,112 ; 109,150.066 109,152.067 ; 109,190 109,192 ; 112,106 114,106 ; 112,196 114,196 ; 113,105 113,107 ; 113,195 113,197 ; 145.05,106.125 147.05,106.125 ; 145.05,196.008 147.05,196.008 ; 146.05,105.125 146.05,107.125 ; 146.05,195.008 146.05,197.008 ; 178,106 180,106 ; 178,196 180,196 ; 179,105 179,107 ; 179,195 179,197 ; 182,111 184,111 ; 182,151.066 184,151.066 ; 182,191 184,191 ; 183,110 183,112 ; 183,150.066 183,152.067 ; 183,190 183,192
Mechanical 1:
  circle w0.01: c183,151.066 r1
  circle w0.01: c183,191 r1
  circle w0.01: c183,111 r1
  circle w0.01: c146.05,106 r1
  circle w0.01: c113,106 r1
  circle w0.01: c179,106 r1
  circle w0.01: c109,151.066 r1
  circle w0.01: c109,191 r1
  circle w0.01: c109,111 r1
  circle w0.01: c179,196 r1
  circle w0.01: c146.05,196 r1
  circle w0.01: c113,196 r1
  lines w0.01: 108,111 110,111 ; 108,151.066 110,151.066 ; 108,191 110,191 ; 109,110 109,112 ; 109,150.066 109,152.067 ; 109,190 109,192 ; 112,106 114,106 ; 112,196 114,196 ; 113,105 113,107 ; 113,195 113,197 ; 145.05,106.125 147.05,106.125 ; 145.05,196.008 147.05,196.008 ; 146.05,105.125 146.05,107.125 ; 146.05,195.008 146.05,197.008 ; 178,106 180,106 ; 178,196 180,196 ; 179,105 179,107 ; 179,195 179,197 ; 182,111 184,111 ; 182,151.066 184,151.066 ; 182,191 184,191 ; 183,110 183,112 ; 183,150.066 183,152.067 ; 183,190 183,192
  lines w0.013: 95.858,22.84 150.49,22.84 ; 96.017,10.119 96.017,65.369 290.985,65.369 ; 96.017,14.369 290.985,14.369 ; 96.017,22.869 150.617,22.869 ; 96.017,27.119 150.617,27.119 290.985,27.119 ; 96.017,31.369 194.817,31.369 ; 96.017,35.619 176.612,35.619 ; 96.017,39.869 176.613,39.869 ; 96.017,44.119 176.613,44.119 ; 96.017,48.369 290.985,48.369 ; 109.614,14.369 109.614,48.369 ; 119.521,10.119 119.521,14.369 ; 123.317,27.119 123.317,48.369 ; 129.817,48.369 129.817,65.369 ; 140.416,27.119 140.416,48.369 ; 148.506,205.006 148.506,210.006 ; 150.617,14.369 150.617,48.369 ; 161.017,27.119 161.017,48.369 ; 176.61,27.119 176.617,65.369 ; 194.817,10.119 194.817,65.369 ; 194.817,58.994 290.985,58.994 ; 246.785,10.213 246.785,14.463 ; 254.585,59.088 254.585,65.463 ; 266.895,10.213 290.985,10.213 ; 269.165,10.201 269.165,14.369 ; 277.985,14.463 277.985,27.213 ; 277.985,18.713 290.985,18.713 ; 0.006,0.006 0.006,210.006 297.006,210.006 297.006,0.006 0.006,0.006 ; 5.006,10.006 292.113,10.006 292.006,205.006 5.006,205.006 5.006,10.006
  text "WENN NICHT ANDERS DEFINIERT:" at 96.611,62.516 h1.5
  text "OBERFLÄCHENGÜTE:" at 130.389,62.515 h1.5
  text "Stueckzahl" at 257.113,61.497 h2.12
  text "1" at 280.048,61.481 h2.12
  text "ZEICHNUNG NICHT SKALIEREN" at 216.4,61.222 h1.5
  text "BEMASSUNGEN SIND IN MILLIMETER" at 96.611,60.016 h1.5
  text "TOLERANZEN:" at 96.611,56.54 h1.5
  text "Deutsches Zentrum fuer Luft- und Raumfahrt (DLR)" at 197.498,55.131 h2.03
  text "Allgemeintoleranz DIN ISO 2768-1" at 96.611,54.04 h1.5
  text "Klasse: f" at 96.611,51.54 h1.5
  text "Institut fuer Materialphysik im Weltraum" at 197.752,50.22 h2.03
  text "TELEFON" at 161.872,46.696 h1.5
  text "Stempel" at 177.842,46.696 h1.5
  text "BENENNUNG:" at 197.513,46.696 h1.5
  text "NAME" at 110.34,46.621 h1.5
  text "SIGNATUR" at 124.351,46.621 h1.5
  text "DATUM" at 141.234,46.621 h1.5
  text "GEZEICHNET" at 96.229,42.549 h1.5
  text "'.ModifiedDate'" at 141.041,42.479 h1.32
  text "Patrick Schmidt" at 111.265,41.415 h1.5
  text "02203 601 3743" at 162.446,41.415 h1.5
  text "GEPRÜFT" at 96.428,38.274 h1.5
  text "GENEHMIGT" at 96.419,34.184 h1.5
  text "'.Project' / '.Pcb_File_Name_No_Path'" at 197.739,34.163 h3.7
  text "PRODUKTION" at 96.473,29.853 h1.5
  text "Projekt" at 96.649,25.624 h1.5
  text "Projekt" at 111.161,25.623 h1.5
  text "Status" at 196.091,24.988 h1.5
  text "WERKSTOFF: FR4" at 151.27,24.397 h1.5
  text "'.Status'" at 208.42,22.746 h3.17
  text "A4" at 281.699,21.349 h2.91
  text "Konstruktions-" at 96.649,21.174 h1.5
  text "'.Pcb_File_Name_No_Path'" at 122.187,20.841 h1.5
  text "unterlagen" at 96.649,18.674 h1.5
  text "'.Version'1.0" at 281.064,15.761 h1.85
  text "'.StatusDate'" at 208.42,15.38 h3.17
  text "Fertigungsunterlagen" at 96.787,12.07 h1.5
  text "MASSSTAB:1:1" at 248.044,11.824 h1.5
  text "BLATT 1 VON 1" at 271.285,11.824 h1.5
  text "GEWICHT:" at 196.101,11.316 h1.5
  text "'.Pcb_File_Name'" at 96.787,7.244 h1.5
PCB Outline:
  circle w0.01: c183,191 r1
  circle w0.01: c183,151.066 r1
  circle w0.01: c183,111 r1
  circle w0.01: c179,106 r1
  circle w0.01: c146.05,106 r1
  circle w0.01: c113,106 r1
  circle w0.01: c109,191 r1
  circle w0.01: c109,151.066 r1
  circle w0.01: c109,111 r1
  circle w0.01: c179,196 r1
  circle w0.01: c113,196 r1
  circle w0.01: c146.05,196 r1
  lines w0.01: 108,111 110,111 ; 108,151.066 110,151.066 ; 108,191 110,191 ; 109,110 109,112 ; 109,150.066 109,152.067 ; 109,190 109,192 ; 112,106 114,106 ; 112,196 114,196 ; 113,105 113,107 ; 113,195 113,197 ; 145.05,106.125 147.05,106.125 ; 145.05,196.008 147.05,196.008 ; 146.05,105.125 146.05,107.125 ; 146.05,195.008 146.05,197.008 ; 178,106 180,106 ; 178,196 180,196 ; 179,105 179,107 ; 179,195 179,197 ; 182,111 184,111 ; 182,151.066 184,151.066 ; 182,191 184,191 ; 183,110 183,112 ; 183,150.066 183,152.067 ; 183,190 183,192
  lines w0.254: 114.411,111.125 cw(c114.411,112.125) 113.411,112.125 113.411,188.849 115.57,191.008 129.54,191.008 177.673,191.008 ; 114.427,111.125 177.689,111.125 ; 170.561,191.008 170.434,191.008 177.419,191.008 cw(c177.419,189.738) 178.689,189.738 178.689,140.589 178.689,112.395 cw(c177.419,112.395) 177.419,111.125 176.403,111.125
Drill Drawing:
  circle w0.01: c183,191 r1
  circle w0.01: c183,151.066 r1
  circle w0.01: c179,196 r1
  circle w0.01: c146.05,196 r1
  circle w0.01: c113,196 r1
  circle w0.01: c109,191 r1
  circle w0.01: c109,151.066 r1
  circle w0.01: c183,111 r1
  circle w0.01: c109,111 r1
  circle w0.01: c146.05,106 r1
  circle w0.01: c179,106 r1
  circle w0.01: c113,106 r1
  lines w0.01: 108,111 110,111 ; 108,151.066 110,151.066 ; 108,191 110,191 ; 109,110 109,112 ; 109,150.066 109,152.067 ; 109,190 109,192 ; 112,106 114,106 ; 112,196 114,196 ; 113,105 113,107 ; 113,195 113,197 ; 145.05,106.125 147.05,106.125 ; 145.05,196.008 147.05,196.008 ; 146.05,105.125 146.05,107.125 ; 146.05,195.008 146.05,197.008 ; 178,106 180,106 ; 178,196 180,196 ; 179,105 179,107 ; 179,195 179,197 ; 182,111 184,111 ; 182,151.066 184,151.066 ; 182,191 184,191 ; 183,110 183,112 ; 183,150.066 183,152.067 ; 183,190 183,192